# Altium PCB busanaliz02.PcbDoc (part 1 of 2)
Units mm, origin at the board's own origin, x right, y up, seen from the top; angles counter-clockwise.
Board outline 118.11 x 70.87 mm, 4 copper layers (Component Side, Ground Plane, Power Plane, Solder Side), stack 0.844 mm thick; 98 components, 86 nets, 476 pads, 172 vias.
Unrouted connection lines stored in the file: 1.
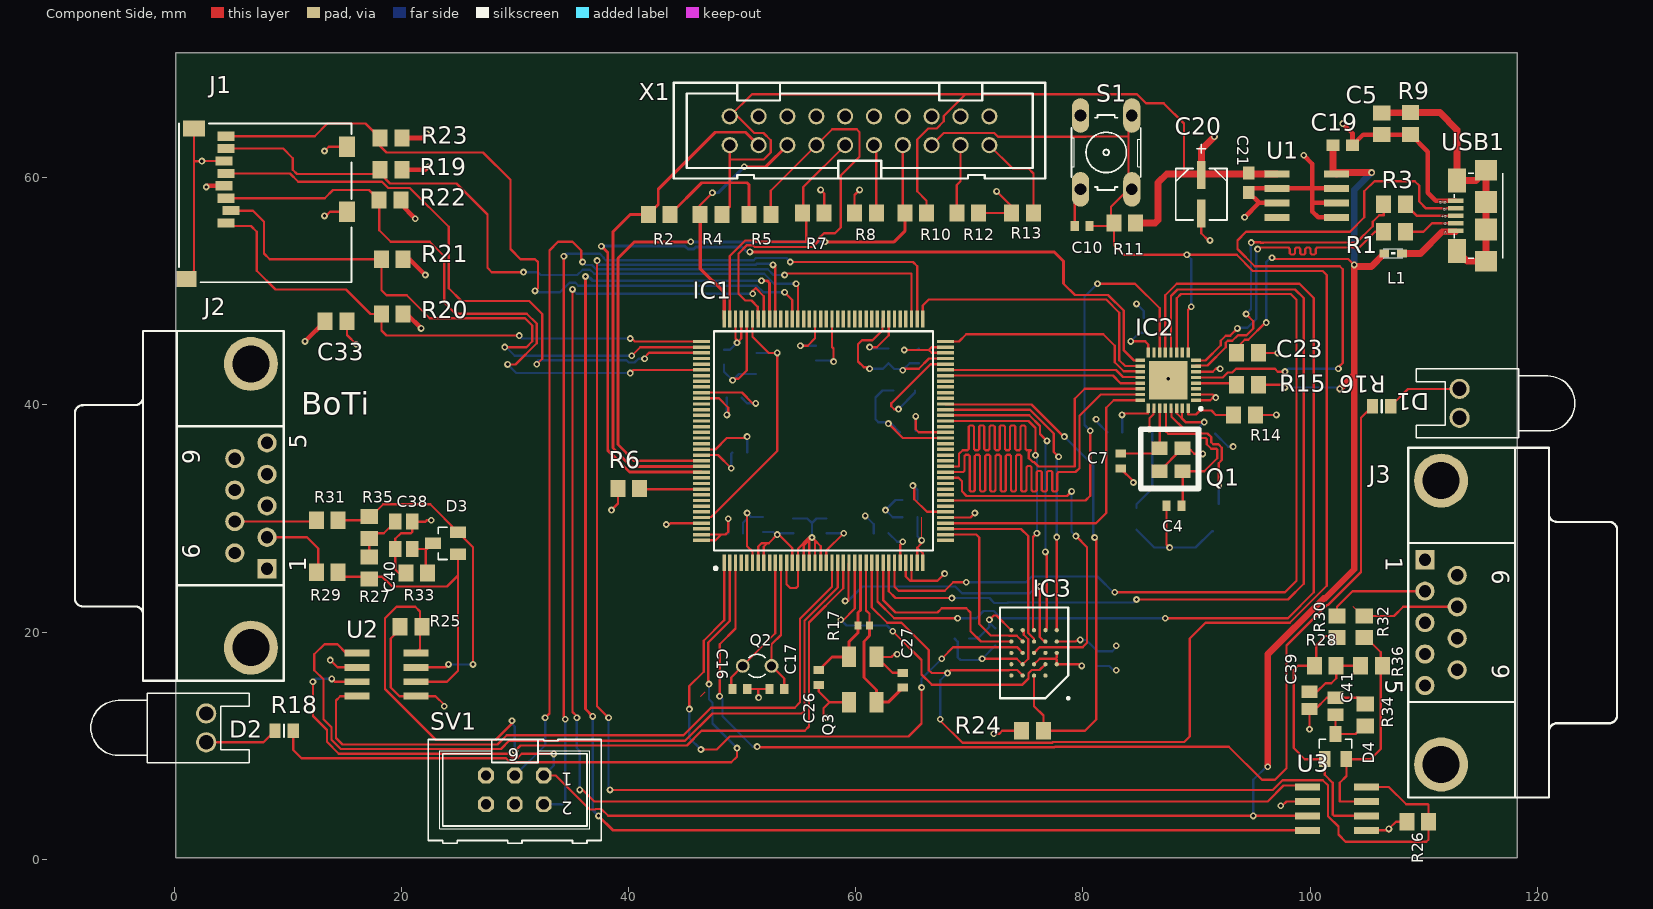
[diagram p0: Component Side view]
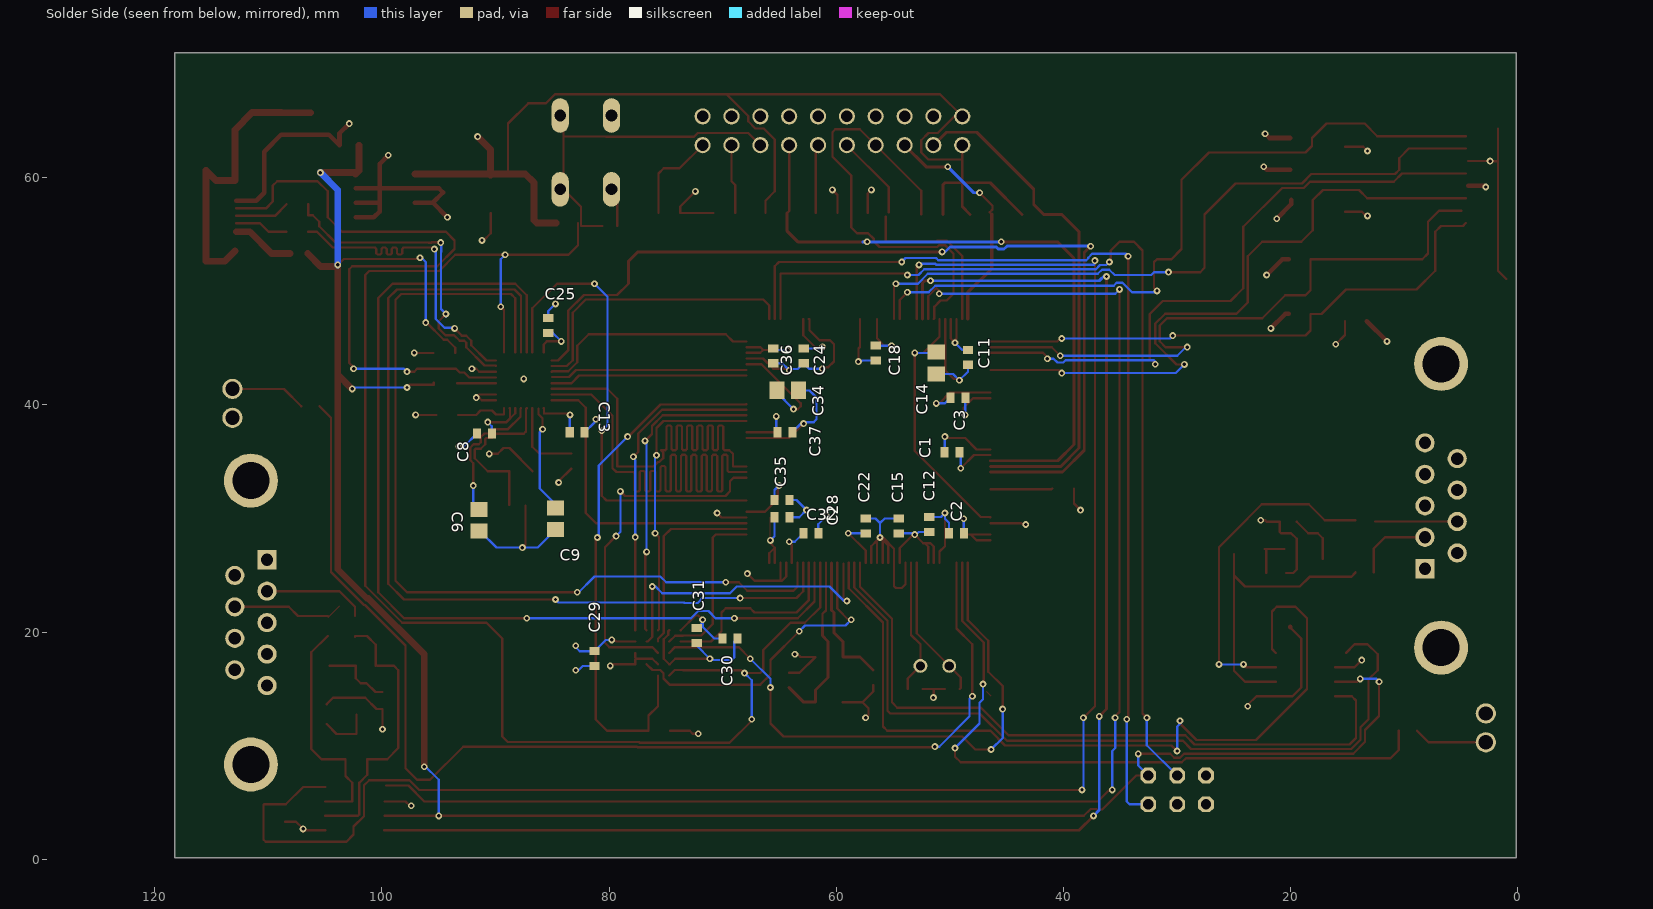
[diagram p1: Solder Side view, seen from below]
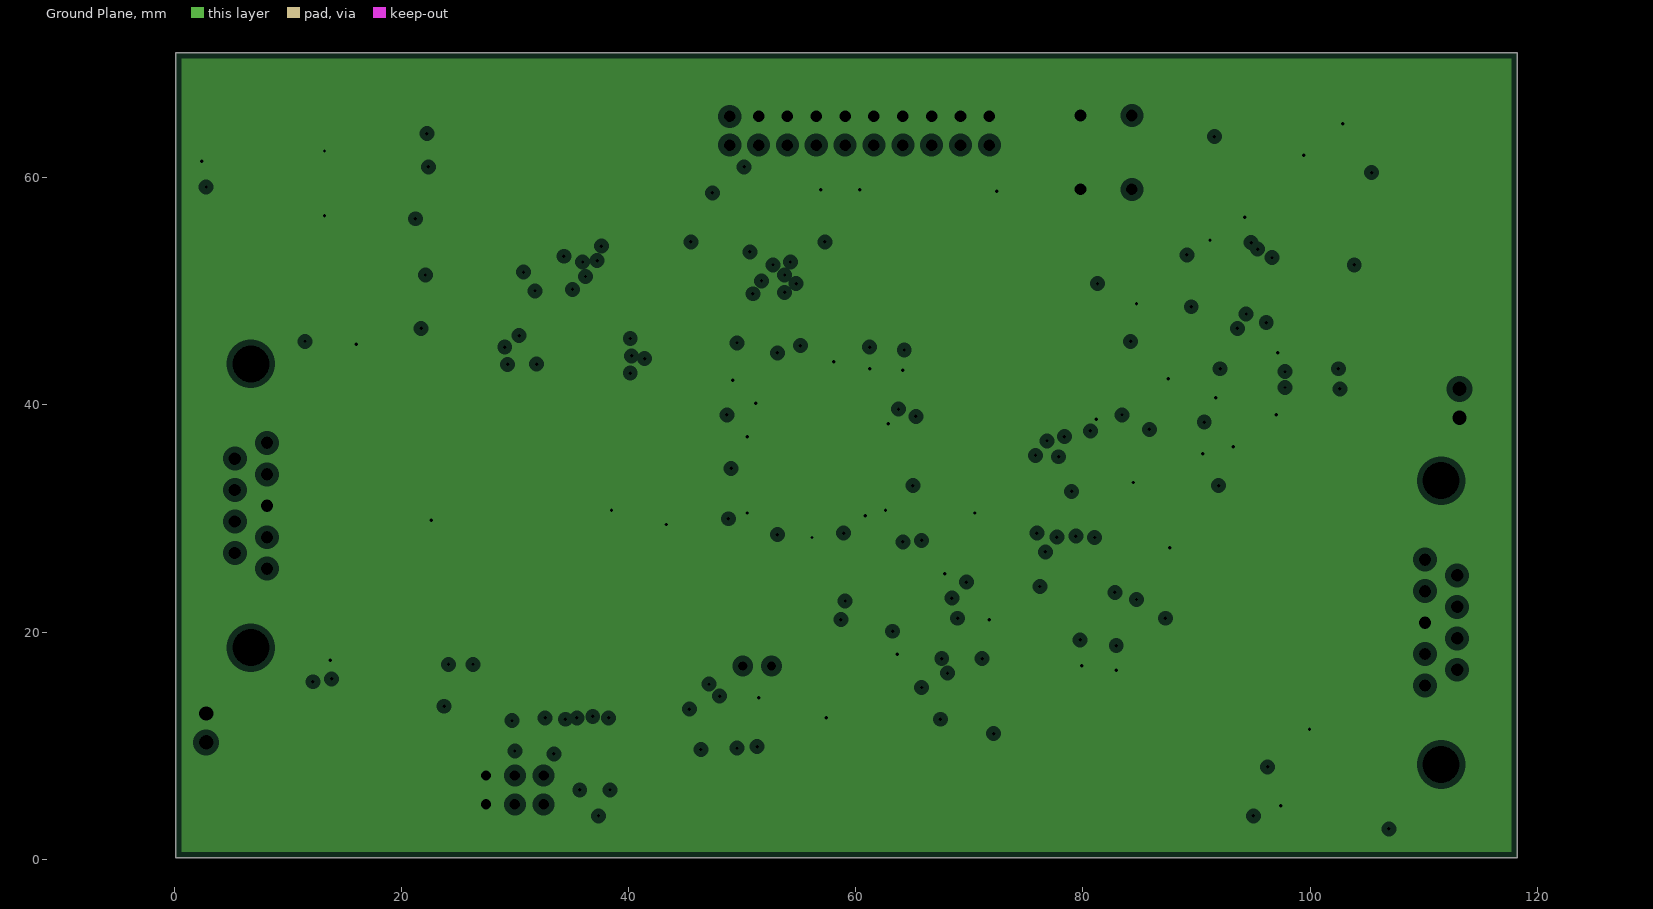
[diagram p2: Ground Plane, clearances drawn from the general rule]
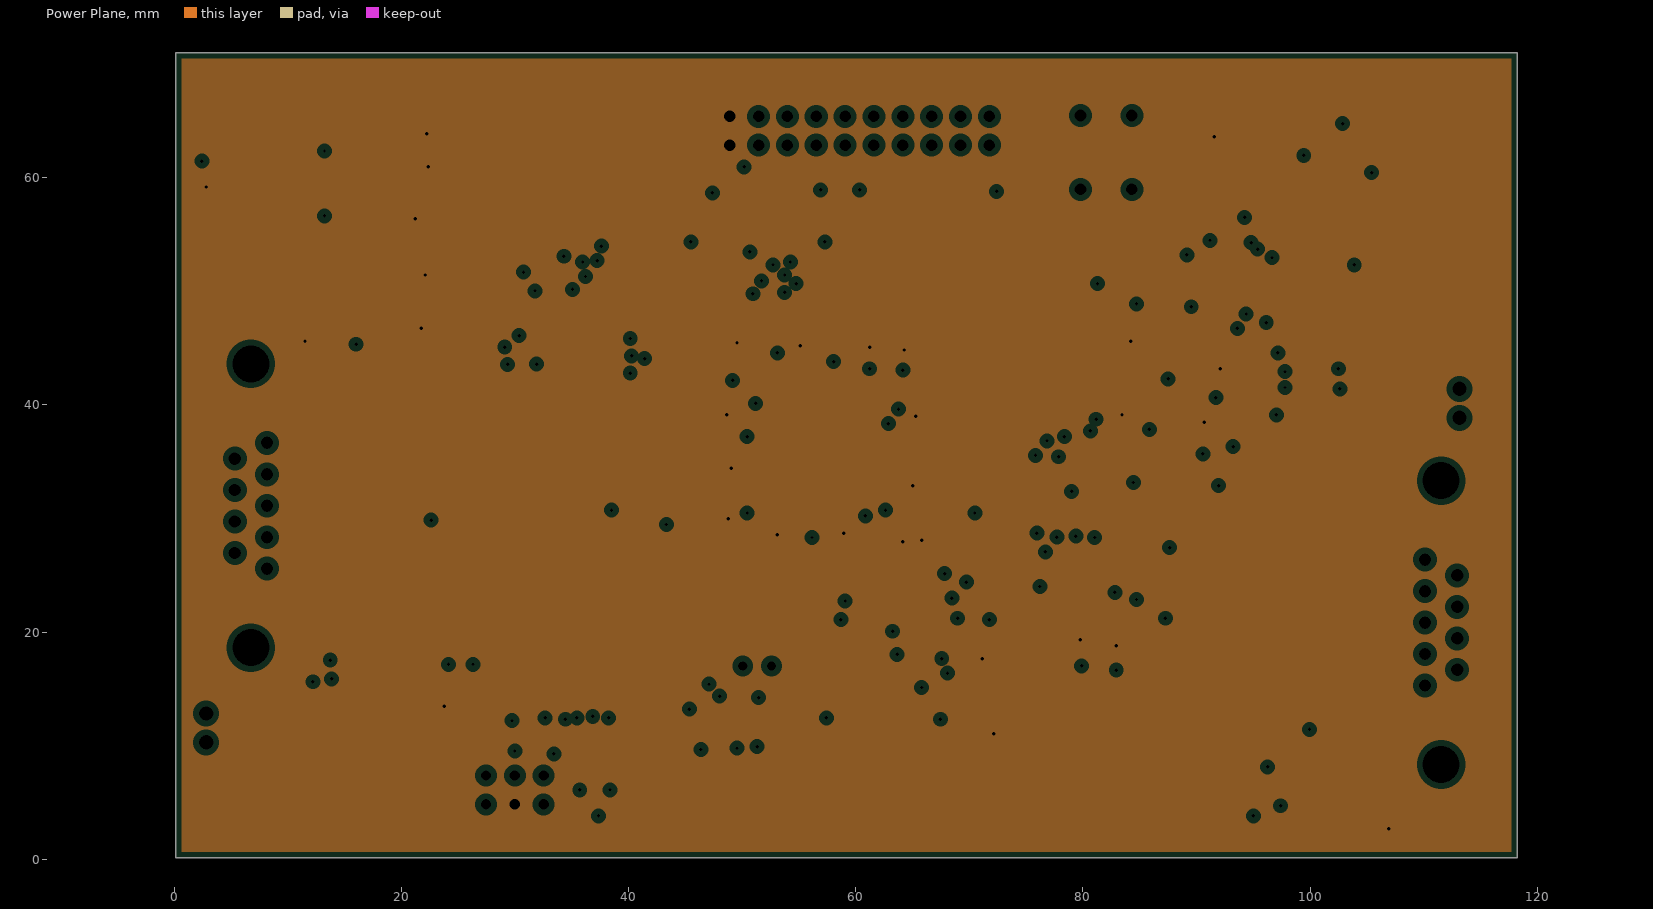
[diagram p3: Power Plane, clearances drawn from the general rule]

## Layer stack, top to bottom
Top Solder: solder mask 0.0102, Solder Resist, Dk 3.5
Component Side: signal copper 0.0356
Dielectric 1: core 0.32, FR-4, Dk 4.8
Ground Plane: plane copper 0.036, net DGND
Dielectric 3: prepreg 0.127, Dk 4.2
Power Plane: plane copper 0.036, net +3V3
Dielectric 4: core 0.254, Dk 4.2
Solder Side: signal copper 0.0356
Bottom Solder: solder mask 0.0102, Solder Resist, Dk 3.5

## Board outline
0.127,0.127 118.237,0.127 118.237,70.993 0.127,70.993

## Design rules (kind name [scope] priority, off if disabled: settings)
Clearance [All] p1: gap=0.2 ignorepadtopadclearanceinfootprint=TRUE
DiffPairsRouting [All] p1: maxlimit=0.254 minlimit=0.2 mostfreqgap=0.254 toplayer_minwidth=0.15 toplayer_maxwidth=0.381 toplayer_prefwidth=0.2 bottomlayer_minwidth=0.15 bottomlayer_maxwidth=0.381 bottomlayer_prefwidth=0.2 maxuncoupledlength=12.7
PlaneClearance [All] p1: clearance=0.508
PlaneConnect [All] p1: planeconnectstyle=Relief reliefexpansion=0.508 reliefentries=4 reliefconductorwidth=0.254 reliefairgap=0.254
PolygonConnect [All] p1: connectstyle=Relief reliefconductorwidth=0.254 reliefentries=4 polygonreliefangle="90 Angle" airgapwidth=0.254
RoutingVias [All] p1: holewidth=0.3 width=0.6 viastyle="Through Hole" minholewidth=0.3 minwidth=0.6 maxholewidth=0.3 maxwidth=0.6
SolderMaskExpansion [All] p1: expansion=0.102
Width [All] p1: maxlimit=0.6 minlimit=0.2 preferedwidth=0.2 minimp=50.000000 maximp=50.000000 favimp=50.000000
27 further rules are at their usual default settings.

## Classes and differential pairs
differential pair D_USB_OTG_HS_D: +USB_OTG_HS_DP -USB_OTG_HS_DM

## Components (designator, comment, footprint, x,y, rotation, side; value= is the part's Value field where it differs from the comment)
C1 "100n" C0402 49.784,35.814 r0 bottom
C2 "100n" C0402 49.403,28.702 r0 bottom
C3 "100n" C0402 49.276,40.64 r0 bottom
C4 "10p" C0402 88.011,31.115 r0 top
C5 "4.7n" C0805#1 106.299,64.77 r270 top
C6 "4.7u" C0805#1 91.44,29.845 r270 bottom
C7 "10p" C0402 83.312,35.052 r90 top
C8 "100n" C0402 90.971,37.484 r0 bottom
C9 "4.7u" C0805#1 84.709,29.972 r270 bottom
C10 "100n" C0402 79.934,55.753 r180 top
C11 "100n" C0402 48.387,44.196 r270 bottom
C12 "100n" C0402 51.816,29.464 r90 bottom
C13 "100n" C0402 82.804,37.592 r180 bottom
C14 "2.2u" C0805#1 51.181,43.688 r270 bottom
C15 "100n" C0402 54.483,29.337 r90 bottom
C16 "10p" C0402 49.784,14.986 r180 top
C17 "10p" C0402 53.035,14.986 r0 top
C18 "100n" C0402 56.515,44.577 r270 bottom
C19 "100n" C0603 102.87,62.865 r0 top
C20 "2.2u" CAPAE430X610N 90.424,58.547 r270 top
C21 "100n" C0603 94.615,59.563 r270 top
C22 "100n" C0402 57.404,29.337 r90 bottom
C23 "4.7u" C0805#1 94.488,44.577 r0 top
C24 "100n" C0402 62.865,44.323 r270 bottom
C25 "100n" C0402 85.344,46.99 r90 bottom
C26 "20p" C0402 56.743,16.002 r270 top
C27 "20p" C0402 64.135,15.748 r90 top
C28 "100n" C0402 62.23,28.702 r180 bottom
C29 "Capacitor" C0402 81.28,17.653 r90 bottom value=100nF
C30 "Capacitor" C0402 69.342,19.431 r180 bottom value=100nF
C31 "Capacitor" C0402 72.263,19.685 r270 bottom value=100nF
C32 "100n" C0402 64.77,30.099 r180 bottom
C33 "4.7u" C0805#1 14.224,47.371 r0 top
C34 "2.2u" C0805#1 64.262,41.275 r180 bottom
C35 "100n" C0402 64.77,31.623 r180 bottom
C36 "100n" C0402 65.532,44.323 r270 bottom
C37 "100n" C0402 64.516,37.592 r180 bottom
C38 "10n" C0805#2 20.193,29.718 r0 top
C39 "10n" C0805#2 99.949,13.97 r270 top
C40 "330n" C0805#2 20.193,27.305 r180 top
C41 "330n" C0805#2 102.235,13.462 r90 top
D1 "LED0" LED-0 113.157,40.132 r90 top
D2 "LED1" LED-0 2.794,11.557 r270 top
D3 "MMBZ27VCLT1G" SOT23 24.003,27.813 r90 top
D4 "MMBZ27VCLT1G" SOT23 102.235,9.779 r0 top
IC1 "STM32H735ZGT6" QFP50P2200X2200X160-144N 57.15,36.83 r90 top
IC2 "USB3300-EZK" QFN50P500X500X100-33N-D 87.503,42.164 r180 top
IC3 "S70KL1281DABHI023" BGA24C100P5X5_600X800X100 75.692,18.161 r180 top
J1 "2908-05WB-MG" CONN_3M_2900 8.001,57.785 r90 top
J2 "DB9 CAN2" DSUB1.385-2H9 -2.767,31.115 r90 top
J3 "DB9 CAN1" DSUB1.385-2H9 121.031,20.828 r270 top
L1 "WE-CBF_0603" 0603 107.315,53.34 r180 top
Q1 "MCSJK-7U-24.00_1" MCSJK-7U-24.00_1 86.741,36.195 r270 top
Q2 "32k" TC26V 51.308,17.018 r180 top
Q3 "ABM3B" ABM3B 58.801,18.723 r270 top
R1 "10" R0805 107.442,55.245 r180 top
R2 "10k" R0805 42.672,56.769 r0 top
R3 "10" R0805 107.442,57.658 r180 top
R4 "10k" R0805 47.244,56.769 r0 top
R5 "10k" R0805 51.562,56.769 r180 top
R6 "10k" R0805 40.005,32.639 r0 top
R7 "10k" R0805 56.261,56.896 r180 top
R8 "10k" R0805 60.833,56.896 r0 top
R9 "1M" R0805 108.839,64.77 r90 top
R10 "10k" R0805 65.278,56.896 r180 top
R11 "10k" R0805 83.693,56.007 r180 top
R12 "10k" R0805 69.85,56.896 r180 top
R13 "10k" R0805 74.676,56.896 r0 top
R14 "12k" R0805 94.234,39.116 r180 top
R15 "10k" R0805 94.488,41.783 r180 top
R16 "Res2" 6-0805_L 106.299,39.878 r0 top value=100
R17 "1M" R0402 60.706,20.574 r180 top
R18 "Res2" 6-0805_L 9.652,11.303 r180 top value=100
R19 "47k" R0805 19.05,60.706 r0 top
R20 "47k" R0805 19.177,48.006 r0 top
R21 "47k" R0805 19.177,52.832 r0 top
R22 "47k" R0805 18.979,58.039 r0 top
R23 "47k" R0805 19.05,63.5 r0 top
R24 "10k" R0805 75.565,11.303 r180 top
R25 "Res2" R0805 20.828,20.462 r180 top value=3.3k
R26 "Res2" R0805 109.474,3.302 r180 top value=3.3k
R27 "Res2" R0805 17.145,25.654 r270 top value=62
R28 "Res2" R0805 101.346,17.018 r180 top value=62
R29 "Res2" R0805 13.462,25.273 r180 top value=0.100
R30 "Res2" R0805 102.362,20.447 r90 top value=0.100
R31 "Res2" R0805 13.462,29.845 r180 top value=0.100
R32 "Res2" R0805 104.775,20.447 r90 top value=0.100
R33 "Res2" R0805 21.336,25.199 r0 top value=470k
R34 "Res2" R0805 104.864,12.7 r270 top value=470k
R35 "Res2" R0805 17.145,29.21 r270 top value=62
R36 "Res2" R0805 105.41,17.018 r180 top value=62
S1 "10-XX" B3F-10XX 82.042,62.23 r90 top
SV1 "ML6" ML6 29.972,6.096 r180 top
U1 "KF33D" SO8#1 99.695,58.42 r270 top
U2 "TJA1044" SO8#2 18.796,16.129 r270 top
U3 "TJA1044" SO8#2 102.489,4.318 r270 top
USB1 "USB_MICROB" USB_MICROB_PACKAGE 112.141,56.642 r90 top
X1 "2520-" PAK100/2500-20 60.325,64.135 r0 top

## Footprints (in the part's own frame and the unit in brackets; to place one, negate y for a bottom-side part, rotate by r counter-clockwise, add the part's x,y. Pads: shape width x height; smd on the part's side, far side on the other; paste and mask are expansions set on the pad)
6-0805_L [mm] "Chip Resistor, Body 2.0x1.2mm, IPC High Density"
  rect 1x1.3 smd: 1(-0.8,0) 2(0.8,0)
  silkscreen extent 0,-0.55 0,0.55, body extent -1.07,-0.7 1.07,0.7, height 0.7
0603 [mil]
  rect 34x28 smd: 1(-30.51,0) 2(31,0)
  silkscreen extent -33,-16 34,16
ABM3B [mil]
  rect 71x48 smd: P$1(36,24) P$2(193,24) P$3(193,119) P$4(36,119)
B3F-10XX [mil]
  oval 120x60 hole 40: 1(-128,89) 2(128,89) 3(-128,-89) 4(128,-89)
  silkscreen extent -130,-120 130,120
BGA24C100P5X5_600X800X100 [mm]
  round 0.37 smd: A2(-1,2) A3(0,2) A4(1,2) A5(2,2) B1(-2,1) B2(-1,1) B3(0,1) B4(1,1) B5(2,1) C1(-2,0) C2(-1,0) C3(0,0) C4(1,0) C5(2,0) D1(-2,-1) D2(-1,-1) D3(0,-1) D4(1,-1) D5(2,-1) E1(-2,-2) E2(-1,-2) E3(0,-2) E4(1,-2) E5(2,-2)
  silkscreen extent -3.1,-4 3,4.1, body extent -3,-4 3,4, height 1
C0402 [mil]
  rect 28x36 smd: 1(-25.59,0) 2(26,0)
C0603 [mil]
  rect 44x40 smd: 1(-33.46,0) 2(34,0)
C0805#1 [mil]
  rect 52x60 smd: 1(-37.4,0) 2(38,0)
C0805#2 [mil] "Chip Capacitor, Body 2.0x1.3mm, IPC High Density"
  rect 43.31x55.12 smd: 1(-29.53,0) 2(29.53,0)
  body extent -43,-29 43,29, height 55
CAPAE430X610N [mil]
  rect 97x30 smd: 1(-66,0) 2(66,0)
  silkscreen extent -173,-89 89,89
CONN_3M_2900 [mil]
  rect 32x59 smd: 1(-69.76,135.78) 2(-26.76,119.78) 3(16.24,135.78) 4(59.24,143.78) 5(102.24,135.78) 6(145.24,143.78) 7(188.24,135.78) 8(231.24,135.78)
  rect 55x75 smd: 9(-263.5,275.5) 10(257.9,247.1)
  rect 71x55 smd: 11(-30.5,-283) 12(194.5,-283)
  silkscreen extent -276,-299 276,299, body extent 0,0 10,10, height 10
DSUB1.385-2H9 [mm] "Connector; D Subminiature; 9 Position; Right Angle; Pitch 1.385 mm"
  rect 1.69x1.69 hole 1.09: 1(-5.54,-10.92)
  round 1.69 hole 1.09: 2(-2.77,-10.92) 3(0,-10.92) 4(2.77,-10.92) 5(5.54,-10.92) 6(-4.155,-8.08) 7(-1.385,-8.08) 8(1.385,-8.08) 9(4.155,-8.08)
  round 4.76 hole 3.26: 10(-12.495,-9.5) 11(12.495,-9.5)
  silkscreen extent -15.4,-12.4 15.4,6
LED-0 [mil] "LED; 2 Leads"
  round 70 hole 50: 1(50,0) 2(-50,0)
  silkscreen extent -120,-400 120,150
MCSJK-7U-24.00_1 [mm]
  rect 1.2x1.4 smd: 1(0,0) 2(2.032,0) 3(2.032,2.032) 4(0,2.032)
  silkscreen extent -1.65,-1.65 3.56,3.43
ML6 [mil]
  oct 54x54 hole 36: 1(-100,-50) 2(-100,50) 3(0,-50) 4(0,50) 5(100,-50) 6(100,50)
  silkscreen extent -300,-175 300,185
PAK100/2500-20 [mil]
  round 56 hole 40: 1(-450,-50) 2(-450,50) 3(-350,-50) 4(-350,50) 5(-250,-50) 6(-250,50) 7(-150,-50) 8(-150,50) 9(-50,-50) 10(-50,50) 11(50,-50) 12(50,50) 13(150,-50) 14(150,50) 15(250,-50) 16(250,50) 17(350,-50) 18(350,50) 19(450,-50) 20(450,50)
  silkscreen extent -644,-165 644,166
QFN50P500X500X100-33N-D [mm]
  rect 0.85x0.3 smd: 1(-2.45,1.75) 2(-2.45,1.25) 3(-2.45,0.75) 4(-2.45,0.25) 5(-2.45,-0.25) 6(-2.45,-0.75) 7(-2.45,-1.25) 8(-2.45,-1.75) 17(2.45,-1.75) 18(2.45,-1.25) 19(2.45,-0.75) 20(2.45,-0.25) 21(2.45,0.25) 22(2.45,0.75) 23(2.45,1.25) 24(2.45,1.75)
  rect 0.3x0.85 smd: 9(-1.75,-2.45) 10(-1.25,-2.45) 11(-0.75,-2.45) 12(-0.25,-2.45) 13(0.25,-2.45) 14(0.75,-2.45) 15(1.25,-2.45) 16(1.75,-2.45) 25(1.75,2.45) 26(1.25,2.45) 27(0.75,2.45) 28(0.25,2.45) 29(-0.25,2.45) 30(-0.75,2.45) 31(-1.25,2.45) 32(-1.75,2.45)
  rect 3.4x3.4 smd: 33(0,0)
  silkscreen extent -3,2.38 -2.75,2.62, body extent -2.55,-2.55 2.55,2.55, height 1
QFP50P2200X2200X160-144N [mm]
  rect 1.475x0.3 smd: 1(-10.738,8.75) 2(-10.738,8.25) 3(-10.738,7.75) 4(-10.738,7.25) 5(-10.738,6.75) 6(-10.738,6.25) 7(-10.738,5.75) 8(-10.738,5.25) 9(-10.738,4.75) 10(-10.738,4.25) 11(-10.738,3.75) 12(-10.738,3.25) 13(-10.738,2.75) 14(-10.738,2.25) 15(-10.738,1.75) 16(-10.738,1.25) 17(-10.738,0.75) 18(-10.738,0.25) 19(-10.738,-0.25) 20(-10.738,-0.75) 21(-10.738,-1.25) 22(-10.738,-1.75) 23(-10.738,-2.25) 24(-10.738,-2.75) 25(-10.738,-3.25) 26(-10.738,-3.75) 27(-10.738,-4.25) 28(-10.738,-4.75) 29(-10.738,-5.25) 30(-10.738,-5.75) 31(-10.738,-6.25) 32(-10.738,-6.75) 33(-10.738,-7.25) 34(-10.738,-7.75) 35(-10.738,-8.25) 36(-10.738,-8.75) 73(10.738,-8.75) 74(10.738,-8.25) 75(10.738,-7.75) 76(10.738,-7.25) 77(10.738,-6.75) 78(10.738,-6.25) 79(10.738,-5.75) 80(10.738,-5.25) 81(10.738,-4.75) 82(10.738,-4.25) 83(10.738,-3.75) 84(10.738,-3.25) 85(10.738,-2.75) 86(10.738,-2.25) 87(10.738,-1.75) 88(10.738,-1.25) 89(10.738,-0.75) 90(10.738,-0.25) 91(10.738,0.25) 92(10.738,0.75) 93(10.738,1.25) 94(10.738,1.75) 95(10.738,2.25) 96(10.738,2.75) 97(10.738,3.25) 98(10.738,3.75) 99(10.738,4.25) 100(10.738,4.75) 101(10.738,5.25) 102(10.738,5.75) 103(10.738,6.25) 104(10.738,6.75) 105(10.738,7.25) 106(10.738,7.75) 107(10.738,8.25) 108(10.738,8.75)
  rect 0.3x1.475 smd: 37(-8.75,-10.738) 38(-8.25,-10.738) 39(-7.75,-10.738) 40(-7.25,-10.738) 41(-6.75,-10.738) 42(-6.25,-10.738) 43(-5.75,-10.738) 44(-5.25,-10.738) 45(-4.75,-10.738) 46(-4.25,-10.738) 47(-3.75,-10.738) 48(-3.25,-10.738) 49(-2.75,-10.738) 50(-2.25,-10.738) 51(-1.75,-10.738) 52(-1.25,-10.738) 53(-0.75,-10.738) 54(-0.25,-10.738) 55(0.25,-10.738) 56(0.75,-10.738) 57(1.25,-10.738) 58(1.75,-10.738) 59(2.25,-10.738) 60(2.75,-10.738) 61(3.25,-10.738) 62(3.75,-10.738) 63(4.25,-10.738) 64(4.75,-10.738) 65(5.25,-10.738) 66(5.75,-10.738) 67(6.25,-10.738) 68(6.75,-10.738) 69(7.25,-10.738) 70(7.75,-10.738) 71(8.25,-10.738) 72(8.75,-10.738) 109(8.75,10.738) 110(8.25,10.738) 111(7.75,10.738) 112(7.25,10.738) 113(6.75,10.738) 114(6.25,10.738) 115(5.75,10.738) 116(5.25,10.738) 117(4.75,10.738) 118(4.25,10.738) 119(3.75,10.738) 120(3.25,10.738) 121(2.75,10.738) 122(2.25,10.738) 123(1.75,10.738) 124(1.25,10.738) 125(0.75,10.738) 126(0.25,10.738) 127(-0.25,10.738) 128(-0.75,10.738) 129(-1.25,10.738) 130(-1.75,10.738) 131(-2.25,10.738) 132(-2.75,10.738) 133(-3.25,10.738) 134(-3.75,10.738) 135(-4.25,10.738) 136(-4.75,10.738) 137(-5.25,10.738) 138(-5.75,10.738) 139(-6.25,10.738) 140(-6.75,10.738) 141(-7.25,10.738) 142(-7.75,10.738) 143(-8.25,10.738) 144(-8.75,10.738)
  silkscreen extent -11.35,-9.65 9.65,9.65, body extent -11,-11 11,11, height 1.6
R0402 [mil]
  rect 24x28 smd: 1(-19.68,0) 2(20,0)
R0805 [mil]
  rect 52x60 smd: 1(-37.4,0) 2(38,0)
SO8#1 [mil]
  rect 24x87 smd: 1(-75,-102.36) 2(-25,-102.36) 3(25,-102.36) 4(75,-102.36) 5(75,103) 6(25,103) 7(-25,103) 8(-75,103)
SO8#2 [mil]
  rect 24x87 smd: 1(-80,-107.36) 2(-30,-107.36) 3(20,-107.36) 4(70,-107.36) 5(70,98) 6(20,98) 7(-30,98) 8(-80,98)
SOT23 [mil]
  rect 40x56 smd: 1(-37.4,-38.31) 2(38,-38.31) 3(0,49)
  silkscreen extent -56,-1 56,31
TC26V [mil]
  round 48 hole 32: 1(-50,0) 2(50,0)
  silkscreen extent -28,-40 29,40
USB_MICROB_PACKAGE [mil]
  rect 16x54 smd: D+(0,-26.77) D-(-25.2,-26.77) GND(52,-26.77) ID(26,-26.77) V(-51.18,-26.77)
  rect 83x63 smd: PAD1(-122.05,-31.5) PAD2(123,-31.5)
  rect 71x75 smd: PAD3(-157.48,-131.89) PAD6(158,-131.89)
  rect 75x75 smd: PAD4(-47.24,-131.89) PAD5(48,-131.89)
  silkscreen extent -148,-189 148,-22

## Part data
C1 C2 C3 C4 C6 C7 C8 C9 C10 C11 C12 C13 C14 C15 C16 C17 C18 C22 C23 C24 C25 C26 C27 C28 C32 C33 C34 C35 C36 C37 C38 C39 C40 C41: library part C-EUC0402, "<B>CAPACITOR</B>, European symbol", SPICEPREFIX=C
C5: library part C-EUC0805, "<B>CAPACITOR</B>, European symbol", SPICEPREFIX=C
C19 C21: library part C-EUC0603, "<B>CAPACITOR</B>, European symbol", SPICEPREFIX=C
C20: library part EEE--CASE-B, MPN=EEE-FT0J101AR, PACKAGE=CASE-B, TOLERANCE="±20 %", VOLTAGERATING=6.3V, OC_FARNELL=2065951, OC_NEWARK=73T9146, SUPPLIER=PANASONIC
C29 C30 C31: library part MCD-00102, "Capacitor, MLCC, 100nF, 16V, X7R, 10%, 0402, T=0,5mm", Alternate_Manufacturer=MURATA, Alternate_Manufacturer_Part_Number=GCM155R71C104KA55D, Manufacturer=YAGEO, MANUFACTURER_PART_NUMBER=CC0402KRX7R7BB104, PACKAGE=C0402, ComponentLink1Description=Datasheet, ComponentLink1URL=http://tunmcdsvn.tun.st.com/Component_Datasheet_Library/Trunk/Capacitors/Yageo_Multilayer_Capacitor_X7R_series_100pF_to_22uF, ECCN_EU=NEC, ECCN_US=EAR99, Internal_Part_Number=MCD-00102, Part_Type=Capacitor, Provided_By=SUBCO, Status=Released
D1: "Typical INFRARED GaAs LED", LatestRevisionDate=08-Jul-2005, LatestRevisionNote="Mech Layer 1 removed.", PackageDescription="LED; 2 Leads", PackageReference=LED-0, Published=8-Jun-2000, Publisher="Altium Limited"
D2: library part LED0, "Typical INFRARED GaAs LED", LatestRevisionDate=08-Jul-2005, LatestRevisionNote="Mech Layer 1 removed.", PackageDescription="LED; 2 Leads", PackageReference=LED-0, Published=8-Jun-2000, Publisher="Altium Limited"
IC1: "Integrated Circuit", Manufacturer_Name=STMicroelectronics, Datasheet Link=https://www.st.com/resource/en/datasheet/stm32h735zg.pdf, Height=1.6mm, MANUFACTURER_PART_NUMBER=STM32H735ZGT6
IC2: "Integrated Circuit", Manufacturer_Name=Microchip, Mouser2 Part Number=886-USB3300-EZK, Datasheet Link=https://componentsearchengine.com//USB3300-EZK.pdf, Height=1mm, MANUFACTURER_PART_NUMBER=USB3300-EZK, Mouser2 Price/Stock=https://www.mouser.com/Search/Refine.aspx?Keyword=886-USB3300-EZK
IC3: "Integrated Circuit", Manufacturer_Name="Cypress Semiconductor", Datasheet Link=https://www.cypress.com/file/183506/download, Height=1mm, MANUFACTURER_PART_NUMBER=S70KL1281DABHI023
J1: "No Description Available", Built_By=EMA_UL_Team, Copyright="Copyright (C) 2018 Accelerated Designs. All rights reserved", MANUFACTURER_PART_NUMBER=2908-05WB-MG, RefDes=RefDes, SourceLibrary=OnlineOrders_2014-07-19, Type=DEV, VENDOR=3M
J2 J3: library part "D Connector 9", "Receptacle Assembly, 9 Position, Right Angle", PackageDocument=O, DatasheetDocument=1-Sep-1999, Gender=Receptacle, LatestRevisionDate=17-Jul-2002, LatestRevisionNote="Re-released for DXP Platform.", Orientation="Right Angle", PackageReference=788750, Positions=9, Published=15-Jun-2001, Publisher="Altium Limited"
L1: "<b> SMD EMI Suppression Ferrite Beads WE-CBF</b> <p> /  / - Excellent anti-EMI properties <br> / - Low DC-restistance <br> / - Impedances till 3000 ohms <br> / - Rated current up to 6 A<p> /  / -- Reliable Ni-Sn electrodes<br> / -- Perfect as data lined filter and for uncoupling of distribution voltage<br>", MPN=742792695, PACKAGE=IND-0603, OC_FARNELL=1635699, OC_NEWARK=08P2449, SUPPLIER="Wuerth Elektronik"
Q2: library part CRYSTALTC26V, "<b>CRYSTAL</b>", 1=1, 2=2, OC_FARNELL=unknown, OC_NEWARK=unknown
R1 R2 R3 R4 R5 R6 R7 R8 R9 R10 R11 R12 R13 R19 R20 R21 R22 R23 R24: library part R-EU_R0805, "<B>RESISTOR</B>, European symbol"
R14 R15: library part R-EU_R0805, SPICEPREFIX=R
R16 R18 R25 R26 R27 R28 R29 R30 R31 R32 R33 R34 R35 R36: "Resistor", LatestRevisionDate=17-Jul-2002, LatestRevisionNote="Re-released for DXP Platform.", PackageDescription="Axial Device, Thru-Hole; 2 Leads; 0.4 in Pin Spacing", PackageReference=AXIAL-0.4, Published=8-Jun-2000, Publisher="Altium Limited"
R17: library part R-EU_R0402, "<B>RESISTOR</B>, European symbol"
S1: "<b>OMRON SWITCH</b>", MPN=B3F-1000, OC_FARNELL=176432, OC_NEWARK=36M3542
SV1: "<b>HARTING</b>", OC_FARNELL=unknown, OC_NEWARK=unknown
USB1: "This is the hirose ZX62-B-5PA(11) MICRO-USB B Type female connection.", USB=USB
X1: "<b>3M (TM) Pak 100 4-Wall Header</b><p> / Source: 3M", OC_FARNELL=unknown, OC_NEWARK=unknown

## Via types
v1: diameter 0.6, hole 0.3, Component Side to Solder Side, 172 vias

## Nets (pads, with @x,y where several pads share a name; then routed paths per layer and width w, separated by ;. In a path a pad name is that pad's centre, name@x,y a point inside that pad or via, vN(x,y) a via of type N, cw(c..) or ccw(c..) an arc to the next point about the centre after c; other vN are vias at no path point)
+3V3: C1.1 C2.1 C3.1 C8.1 C11.1 C12.1 C13.1 C15.1 C18.1 C20.1 C21.1 C22.1 C24.1 C25.1 C28.1 C29.2 C30.2 C31.2 C32.1 C33.1 C35.1 C36.1 C37.1 IC1.7 IC1.8 IC1.13 IC1.19 IC1.32 IC1.35 IC1.36 IC1.42 IC1.56 IC1.70 IC1.71 IC1.79 IC1.92 IC1.105 IC1.106 IC1.119 IC1.129 IC1.143 IC1.144 IC2.6 IC2.16 IC2.25 IC2.30 IC2.31 IC3.B4 IC3.D1 IC3.E4 J1.4 R2.2 R4.2 R5.2 R10.1 R11.1 R19.2 R20.2 R21.2 R22.2 R23.2 R24.2 R25.2 R26.2 SV1.4 U1.1 U2.5 U3.5 X1.1 X1.2 | length 250.8
  Component Side w0: v1(65.786,28.067) 65.786,30.099
  Component Side w0.2: R25.2@20.028,20.409 19.05,19.431 19.05,15.113 19.812,14.351 U2.5@21.285,14.351 22.987,14.351 23.749,13.589 v1(23.749,13.462) ; IC1.144@46.412,28.08 47.638,28.08 48.138,28.58 ; IC1.143@46.412,28.58 48.138,28.58 ; IC1.129@46.412,35.58 47.859,35.58 v1(49.022,34.417) ; IC1.119@46.412,40.58 47.939,40.58 48.768,39.751 48.768,39.243 v1(48.641,39.116) ; v1(48.768,29.972) 48.768,28.829 48.519,28.58 48.138,28.58 ; 48.914,61.614 51.884,61.614 52.5,62.23 52.5,63.306 51.876,63.93 51.05,63.93 49.575,65.405 X1.2@48.895,65.405 50.849,67.359 69.663,67.359 ; IC1.106@49.4,47.568 49.4,45.85 49.53,45.72 v1(49.53,45.466) 49.9,45.836 IC1.105@49.9,47.568 ; IC1.7@51.4,26.092 51.4,27.524 51.689,27.813 52.197,27.813 ; IC1.8@51.9,26.092 51.9,27.516 52.197,27.813 ; v1(53.086,28.575) 52.324,27.813 52.197,27.813 ; v1@53.213,28.575 54.4,27.388 IC1.13@54.4,26.092 ; v1(55.118,45.212) 55.753,45.212 56.4,45.859 IC1.92@56.4,47.568 ; IC1.19@57.4,26.092 57.4,27.174 v1(58.928,28.702) ; v1(61.214,45.085) 61.849,45.085 62.9,46.136 IC1.79@62.9,47.568 ; IC1.32@63.9,26.092 63.9,27.705 v1(64.135,27.94) ; v1(64.262,44.831) 66.421,44.831 ; v1(65.024,32.893) 65.151,32.766 65.151,31.696 66.267,30.58 IC1.42@67.888,30.58 ; v1(65.278,38.989) 65.278,37.846 65.544,37.58 IC1.56@67.888,37.58 ; IC1.35@65.4,26.092 65.4,27.427 ; v1(65.786,28.067) 65.786,27.813 65.4,27.427 ; IC1.36@65.9,26.092 65.9,26.927 65.4,27.427 ; R10.1@66.228,56.896 66.228,57.978 65.405,58.801 65.405,63.373 66.372,64.34 67.116,64.34 67.74,64.964 67.74,65.437 69.663,67.359 ; IC1.70@67.888,44.58 66.672,44.58 66.421,44.831 ; IC1.71@67.888,45.08 66.67,45.08 66.421,44.831 ; v1(71.12,17.653) 74.168,17.653 74.66,17.161 IC3.B4@74.692,17.161 75.184,17.653 75.184,19.355 74.784,19.755 74.784,20.069 IC3.E4@74.692,20.161 ; v1(72.136,11.049) 72.644,11.049 72.898,11.303 R24.2@74.6,11.303 ; IC3.D1@77.692,19.161 79.359,19.161 79.502,19.304 v1(79.756,19.304) ; v1(83.439,39.116) 83.566,39.243 85.716,39.243 85.725,39.252 85.725,39.686 IC2.25@85.753,39.714 ; v1(84.201,45.593) 85.471,45.593 85.753,45.311 IC2.16@85.753,44.614 ; IC2.30@88.253,39.714 88.253,39.255 89.027,38.481 v1(90.678,38.481) ; 88.712,38.94 88.712,39.714 IC2.31@88.753,39.714 ; 88.9,60.325 88.9,64.77 87.122,66.548 85.576,66.548 84.765,67.359 69.663,67.359 ; IC2.6@89.953,42.914 91.428,42.914 91.694,43.18 v1(92.075,43.18) ; U3.5@104.978,2.54 106.807,2.54 106.934,2.413 v1(106.934,2.667) 107.569,3.302 R26.2@108.509,3.302
  Component Side w0.254: R2.2@43.637,56.769 46.431,59.563 48.895,59.563 ; R4.2@48.209,56.769 48.895,57.455 48.895,59.563 ; X1.1@48.895,62.865 48.895,59.563 ; R5.2@50.597,56.769 50.597,59.385 50.419,59.563 48.895,59.563
  Component Side w0.4: v1(2.794,59.182) 2.902,59.29 J1.4@4.349,59.29 ; v1(11.496,45.593) C33.1@13.274,47.371 ; R22.2@19.944,58.039 19.944,57.653 v1(21.209,56.388) ; R19.2@20.015,60.706 22.098,60.706 v1(22.352,60.96) ; R23.2@20.015,63.5 21.844,63.5 v1(22.225,63.881) ; R25.2@20.028,20.409 R25.2@20.028,20.462 ; R20.2@20.142,48.006 20.447,48.006 v1(21.717,46.736) ; R21.2@20.142,52.832 20.701,52.832 v1(22.098,51.435)
  Component Side w0.6: R11.1@84.643,56.007 86.36,56.007 86.614,56.261 86.614,59.563 87.376,60.325 88.9,60.325 C20.1@90.424,60.325 ; C20.1@90.424,60.223 C20.1@90.424,60.325 ; v1(91.567,63.627) 90.424,62.484 C20.1@90.424,60.325 ; U1.1@97.095,60.325 C20.1@90.424,60.325
  Solder Side w0.2: C11.1@48.387,44.846 48.91,44.846 v1(49.53,45.466) ; v1(48.641,39.116) C3.1@48.641,40.625 ; C2.1@48.753,28.702 48.768,28.717 v1(48.768,29.972) ; v1(49.022,34.417) 49.022,35.702 C1.1@49.134,35.814 ; C12.1@51.816,28.814 52.72,28.814 52.959,28.575 v1(53.086,28.575) ; v1@53.198,28.687 C15.1@54.483,28.687 ; v1(55.118,45.212) C18.1@56.5,45.212 ; C22.1@57.419,28.702 v1(58.928,28.702) ; v1@61.326,44.973 C24.1@62.865,44.973 ; C28.1@62.88,28.702 63.642,27.94 v1(64.135,27.94) ; v1(64.262,44.831) 65.39,44.831 C36.1@65.532,44.973 ; v1(65.024,32.893) 65.42,32.497 C35.1@65.42,31.623 ; C37.1@65.278,37.704 v1(65.278,38.989) ; C32.1@65.42,30.099 65.42,28.433 v1(65.786,28.067) ; C30.2@68.682,19.431 68.961,19.152 68.961,17.78 69.215,17.526 70.993,17.526 v1(71.12,17.653) C31.2@72.263,18.796 ; v1(79.756,19.304) 80.289,19.304 C29.2@81.28,18.313 82.575,18.313 83.058,18.796 v1(82.931,18.796) ; C13.1@83.454,37.592 v1@83.454,39.101 ; v1(84.201,45.593) 84.948,46.34 C25.1@85.344,46.34 ; C8.1@90.321,37.484 90.321,38.124 v1(90.678,38.481)
+5V: C19.1 C23.1 L1.2 R15.1 SV1.1 U1.8 U2.3 U3.3 | length 198.8
  Component Side w0.2: v1(12.192,15.621) 12.192,12.609 13.424,11.377 13.424,10.337 14.471,9.29 29.358,9.29 29.723,8.925 30.221,8.925 30.586,9.29 33.128,9.29 33.274,9.144 v1(33.401,9.271) ; v1(13.843,15.875) 14.097,15.621 U2.3@16.069,15.621 ; SV1.1@32.512,7.366 33.568,7.366 36.573,4.361 37.041,4.361 37.089,4.41 37.587,4.41 38.187,3.81 v1(94.996,3.81) U3.3@99.762,3.81 ; C23.1@93.538,44.577 93.538,45.024 94.25,45.736 94.562,45.736 96.07,47.244 v1(96.139,47.244) ; R15.1@95.438,41.976 R15.1@95.438,41.783 97.536,41.783 v1(97.79,41.529) ; v1(96.647,52.959) 96.755,52.851 98.159,52.851 98.165,52.846 100.539,52.846 100.545,52.851 103.359,52.851 v1(103.886,52.324)
  Component Side w0.6: v1(96.266,8.128) 96.266,18.011 101.227,22.973 101.332,22.973 103.886,25.527 103.886,42.672 ; C19.1@102.02,62.865 102.02,60.616 U1.8@102.311,60.325 ; U1.8@102.438,60.452 v1(105.41,60.452) ; v1(102.616,41.402) 103.886,42.672 ; L1.2@106.528,53.34 105.385,52.197 104.013,52.197 v1(103.886,52.324) 103.886,42.672
  Solder Side w0.2: v1(12.192,15.621) 12.446,15.875 v1(13.843,15.875) ; SV1.1@32.512,7.366 33.401,8.255 v1(33.401,9.271) ; v1(94.996,3.81) 94.996,6.985 96.266,8.255 v1(96.266,8.128) ; v1(96.139,47.244) 96.139,52.578 96.647,53.086 v1(96.647,52.959) ; v1(97.79,41.529) 102.362,41.529 102.489,41.402 v1(102.616,41.402)
  Solder Side w0.6: v1(103.886,52.324) 103.886,58.928 v1(105.41,60.452)
CAN1_H: J3.7 R32.2 | length 9.9
  Component Side w0: 103.771,22.251 R32.2@104.775,21.247
  Component Side w0.2: R32.2@104.775,21.412 107.391,21.412 108.192,22.213 J3.7@112.951,22.213
CAN1_L: J3.2 R30.2 | length 9.1
  Component Side w0.2: R30.2@102.362,21.412 102.362,22.225 103.735,23.598 J3.2@110.111,23.598
CAN2_H: J2.7 R31.2 | length 7.2
  Component Side w0.2: J2.7@5.313,29.73 R31.2@12.547,29.73
CAN2_L: J2.2 R29.2 | length 7
  Component Side w0.2: J2.2@8.153,28.345 11.66,28.345 12.662,27.343 R29.2@12.662,25.273
DGND: C1.2 C2.2 C3.2 C4.1 C5.2 C6.2 C7.1 C8.2 C9.2 C10.2 C11.2 C12.2 C13.2 C14.2 C15.2 C16.1 C17.1 C18.2 C19.2 C20.2 C21.2 C22.2 C23.2 C24.2 C25.2 C26.2 C27.2 C28.2 C29.1 C30.1 C31.1 C32.2 C33.2 C34.2 C35.2 C36.2 C37.2 C38.2 C39.2 C40.2 C41.2 D1.2 D2.2 IC1.6 IC1.12 IC1.14 IC1.15 IC1.16 IC1.17 IC1.18 IC1.33 IC1.34 IC1.41 IC1.55 IC1.69 IC1.80 IC1.89 IC1.104 IC1.118 IC1.128 IC1.141 IC2.1 IC2.2 IC2.33 IC3.B1 IC3.B3 IC3.C1 IC3.E5 J1.6 J1.9 J1.10 J1.11 J1.12 J2.3 J3.3 Q1.2 Q1.4 Q3.P$2 Q3.P$4 R6.1 R7.1 R8.1 R9.1 R12.1 R13.1 R14.1 R33.1 R34.1 S1.1 S1.2 SV1.5 SV1.6 U1.2 U1.3 U1.5 U1.6 U1.7 U2.2 U3.2 USB1.GND X1.4 X1.6 X1.8 X1.10 X1.12 X1.14 X1.16 X1.18 X1.20 | length 259.9
  Component Side w0: v1(82.931,16.637) v1@83.185,16.637
  Component Side w0.2: J1.9@1.003,51.092 1.725,51.813 J1.10@1.725,64.336 ; 1.731,61.462 v1(2.419,61.462) 2.419,61.474 J1.6@4.349,61.474 ; v1(13.208,56.642) 13.335,56.642 13.703,57.01 J1.11@15.189,57.01 ; v1(13.208,62.357) 13.576,62.725 J1.12@15.189,62.725 ; v1(13.716,17.526) 14.351,16.891 U2.2@16.069,16.891 ; C33.2@15.189,47.371 15.189,46.152 v1(16.002,45.339) ; R33.1@20.386,25.199 19.759,25.199 19.443,25.515 C40.2@19.443,27.305 19.443,28.206 19.939,28.702 20.828,28.702 20.943,28.817 C38.2@20.943,29.718 22.098,29.718 22.225,29.845 v1(22.606,29.845) ; v1(38.481,30.734) 39.055,31.308 R6.1@39.055,32.639 ; v1(43.307,29.464) 43.561,29.464 43.677,29.58 IC1.141@46.412,29.58 ; IC1.128@46.412,36.08 47.637,36.08 48.641,37.084 50.419,37.084 v1(50.419,37.211) ; IC1.118@46.412,41.08 49.979,41.08 50.927,40.132 v1(51.181,40.132) ; v1(49.149,42.164) 49.276,42.291 49.657,42.291 50.4,43.034 IC1.104@50.4,47.568 ; v1(50.419,30.48) 50.419,27.559 50.9,27.078 IC1.6@50.9,26.092 ; C16.1@50.434,14.986 51.41,14.986 ; v1(51.435,14.224) 51.41,14.249 51.41,14.986 ; C17.1@52.385,14.986 51.41,14.986 ; IC1.12@53.9,26.092 53.9,24.205 54.229,23.876 54.737,23.876 54.9,24.039 IC1.14@54.9,26.092 54.9,27.341 55.88,28.321 v1(56.134,28.321) ; IC1.15@55.4,26.092 55.4,27.587 55.9,28.087 ; IC1.16@55.9,26.092 55.9,28.087 ; IC1.17@56.4,26.092 56.4,28.055 ; C26.2@56.743,15.342 56.743,14.758 57.68,13.821 ; v1(56.896,58.928) 57.211,58.613 R7.1@57.211,56.896 ; IC1.18@56.9,26.092 56.9,27.555 56.4,28.055 ; v1(57.404,12.446) 57.15,12.7 57.15,13.29 57.68,13.821 ; IC1.89@57.9,47.568 57.9,45.097 58.039,44.958 v1(58.039,43.815) ; Q3.P$2@59.411,13.821 57.68,13.821 ; R8.1@59.883,56.896 59.883,58.486 v1(60.325,58.928) ; v1(61.214,43.18) 61.087,43.307 60.706,43.307 60.198,43.815 60.198,45.339 60.544,45.685 61.463,45.685 62.35,46.572 62.35,47.518 IC1.80@62.4,47.568 ; v1(62.865,38.354) 64.139,37.08 IC1.55@67.888,37.08 ; v1(63.627,18.034) 63.373,18.034 63.147,17.808 Q3.P$4@61.824,17.808 63.224,16.408 C27.2@64.135,16.408 ; v1(64.135,43.053) 64.262,43.18 65.532,43.18 66.432,44.08 IC1.69@67.888,44.08 ; IC1.33@64.4,26.092 64.4,24.881 64.77,24.511 67.183,24.511 v1(67.818,25.146) ; 64.9,24.635 IC1.34@64.9,26.092 ; IC1.41@67.888,30.08 70.085,30.08 v1(70.485,30.48) ; R12.1@70.8,56.896 R13.1@73.726,56.896 73.726,57.465 v1(72.39,58.801) ; v1(71.755,21.082) 72.136,21.463 72.39,21.463 IC3.E5@73.692,20.161 ; IC3.B3@75.692,17.161 76.184,17.653 77.597,17.653 77.692,17.748 IC3.C1@77.692,18.161 ; 77.692,17.558 IC3.B1@77.692,17.161 79.74,17.161 v1(79.883,17.018) ; C10.2@79.273,55.753 S1.1@79.273,58.471 ; C7.1@83.312,34.402 84.44,33.274 v1(84.44,33.162) ; Q1.2@86.741,34.163 Q1.4@88.773,36.195 89.281,36.195 89.789,35.687 v1(90.551,35.687) ; C4.1@87.361,31.115 87.361,27.701 v1(87.63,27.432) ; IC2.1@89.953,40.414 91.214,40.414 91.44,40.64 v1(91.694,40.64) 91.42,40.914 IC2.2@89.953,40.914 ; C20.2@90.424,56.871 90.424,55.118 91.059,54.483 v1(91.186,54.483) ; R14.1@95.184,39.116 v1(97.028,39.116) ; C23.2@95.453,44.577 v1(97.155,44.577) ; v1(97.409,4.699) 97.536,4.699 97.917,5.08 U3.2@99.762,5.08 ; v1(99.949,11.43) C39.2@99.949,13.22 100.469,13.22 101.461,14.212 C41.2@102.235,14.212 104.302,14.212 R34.1@104.864,13.65 ; 55.9,28.087 v1(56.134,28.321) ; v1(56.134,28.321) 56.4,28.055
  Component Side w0.4: IC2.33@87.503,42.164 v1(87.503,42.291) ; v1(94.234,56.515) 95.504,57.785 95.529,57.785 ; U1.3@97.095,57.785 95.529,57.785 ; v1(99.441,61.976) 100.203,61.214 100.203,59.055 ; U1.5@102.311,56.515 100.711,56.515 100.203,57.023 100.203,57.785 ; U1.6@102.311,57.785 100.203,57.785 ; U1.7@102.311,59.055 100.203,59.055 ; v1(102.87,64.77) 103.734,63.906 C19.2@103.734,62.865 104.673,63.805 C5.2@106.299,63.805 108.854,63.805 110.363,62.296 110.363,58.674 111.074,57.963 USB1.GND@112.821,57.963 ; 95.529,57.785 C21.2@94.615,58.699 94.971,59.055 U1.2@97.095,59.055 100.203,59.055 ; 100.203,57.785 100.203,59.055
  Solder Side w0.2: C11.2@48.387,43.536 48.387,42.926 v1(49.149,42.164) 49.708,42.723 C14.2@51.181,42.723 ; C3.2@49.936,40.64 50.444,40.132 v1(51.181,40.132) ; C2.2@50.063,28.702 50.063,29.616 50.419,29.972 v1(50.419,30.48) 50.775,30.124 C12.2@51.816,30.124 ; C1.2@50.444,35.814 v1@50.444,37.186 ; C15.2@54.483,29.997 55.728,29.997 56.134,29.591 ; v1(56.134,28.321) 56.134,29.591 ; C18.2@56.515,43.917 57.683,43.917 57.785,43.815 v1(58.039,43.815) ; C22.2@57.404,29.997 56.54,29.997 56.134,29.591 ; v1(60.833,30.226) 61.57,29.489 C28.2@61.57,28.702 ; v1(61.214,43.18) 62.382,43.18 C24.2@62.865,43.663 63.373,43.155 v1@64.237,43.155 ; v1@62.738,38.481 61.976,38.481 61.722,38.735 61.722,40.64 62.357,41.275 C34.2@63.297,41.275 ; v1(62.865,38.354) 63.094,38.354 C37.2@63.856,37.592 ; C32.2@64.11,30.099 63.246,30.099 v1(62.611,30.734) 63.5,31.623 C35.2@64.11,31.623 ; v1(64.135,43.053) v1@64.237,43.155 ; C36.2@65.532,43.663 64.745,43.663 v1@64.237,43.155 ; C30.1@69.992,19.431 70.739,19.431 71.755,20.447 v1@71.755,20.843 ; v1(71.755,21.082) v1@71.755,20.843 ; C31.1@72.263,20.335 v1@71.755,20.843 ; v1(81.153,38.735) 81.28,38.735 81.28,38.456 C13.2@82.144,37.592 ; C29.1@81.28,17.003 82.311,17.003 82.677,16.637 v1(82.931,16.637) ; C9.2@84.709,29.007 86.284,27.432 v1(87.63,27.432) 89.916,27.432 91.364,28.88 C6.2@91.44,28.88 ; v1(84.709,48.895) 85.344,48.26 C25.2@85.344,47.65 ; C8.2@91.631,37.484 92.793,36.322 v1(93.218,36.322) v1@93.345,36.322 ; v1(97.409,4.699) v1@97.536,4.699
FD1_CANRX: IC1.100 U3.4 | length 130.8
  Component Side w0.254: v1(36.195,51.308) 36.195,13.208 v1(36.83,12.573) ; v1(37.338,3.81) 38.608,2.54 U3.4@99.762,2.54 ; v1(51.689,50.927) 52.197,50.927 52.4,50.724 IC1.100@52.4,47.568
  Solder Side w0.254: v1@36.068,51.181 v1(36.195,51.308) 36.322,51.435 36.83,50.927 v1(51.689,50.927) ; v1(36.83,12.573) 36.83,4.318 v1(37.338,3.81)